# Altium PCB PCB1.PcbDoc (part 2 of 2)
Units mm, origin at the board's own origin, x right, y up, seen from the top; angles counter-clockwise.
Board outline 25 x 30 mm, 2 copper layers (Top Layer, Bottom Layer); 264 components, 8 nets, 720 pads, 0 vias.
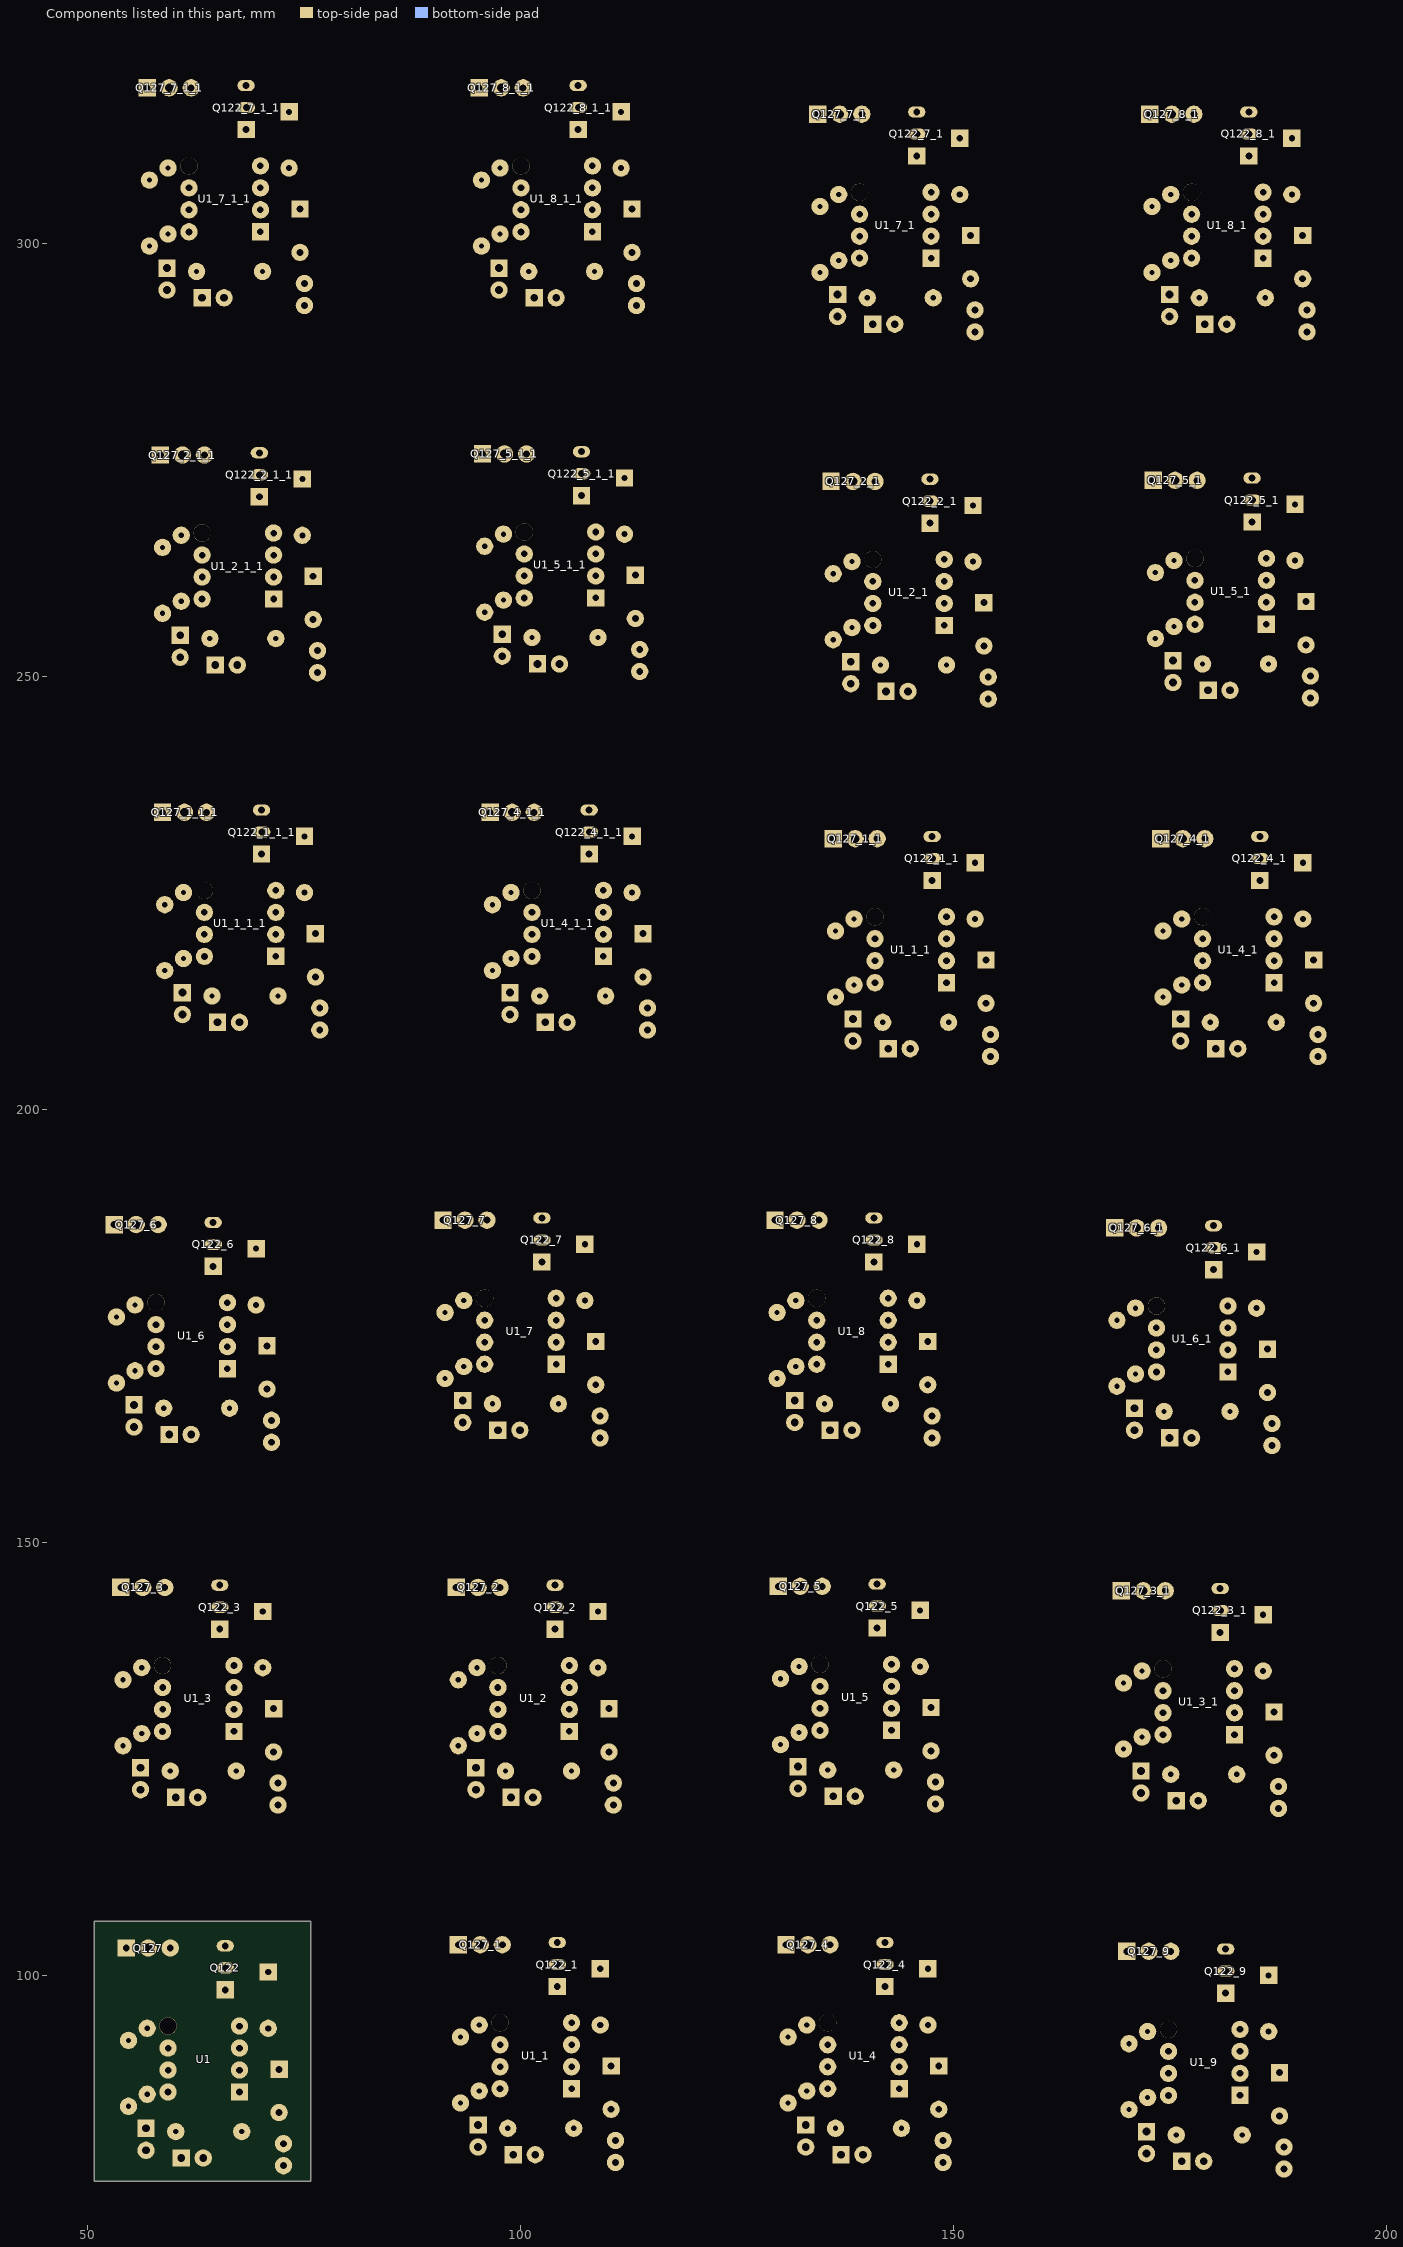
[diagram p2: the components of this part, seen from the top]

## Nets (pads, with @x,y where several pads share a name; then routed paths per layer and width w, separated by ;. In a path a pad name is that pad's centre, name@x,y a point inside that pad or via, vN(x,y) a via of type N, cw(c..) or ccw(c..) an arc to the next point about the centre after c; other vN are vias at no path point) (continued)
copper on no net: | length 4518.3
  Bottom Layer w0.5: 62.103,185.674 65.659,185.674 ; 62.865,143.764 66.421,143.764 ; 65.913,316.992 69.469,316.992 ; 67.437,274.574 70.993,274.574 ; 67.691,233.299 71.247,233.299 ; 100.076,186.182 103.632,186.182 ; 101.6,143.764 105.156,143.764 ; 101.854,102.489 105.41,102.489 ; 104.267,316.992 107.823,316.992 ; 104.648,274.701 108.204,274.701 ; 105.537,233.299 109.093,233.299 ; 138.43,186.182 141.986,186.182 ; 138.811,143.891 142.367,143.891 ; 139.7,102.489 143.256,102.489 ; 143.383,313.944 146.939,313.944 ; 144.907,271.526 148.463,271.526 ; 145.161,230.251 148.717,230.251 ; 177.673,185.293 181.229,185.293 ; 178.435,143.383 181.991,143.383 ; 179.07,101.727 182.626,101.727 ; 181.737,313.944 185.293,313.944 ; 182.118,271.653 185.674,271.653 ; 183.007,230.251 186.563,230.251
  Bottom Layer w0.7: 57.023,188.468 69.977,188.468 ; 57.785,146.558 70.739,146.558 ; 60.833,319.786 73.787,319.786 ; 62.357,277.368 75.311,277.368 ; 62.611,236.093 75.565,236.093 ; 94.996,188.976 107.95,188.976 ; 96.52,146.558 109.474,146.558 ; 96.774,105.283 109.728,105.283 ; 99.187,319.786 112.141,319.786 ; 99.568,277.495 112.522,277.495 ; 100.457,236.093 113.411,236.093 ; 133.35,188.976 146.304,188.976 ; 133.731,146.685 146.685,146.685 ; 134.62,105.283 147.574,105.283 ; 138.303,316.738 151.257,316.738 ; 139.827,274.32 152.781,274.32 ; 140.081,233.045 153.035,233.045 ; 172.593,188.087 185.547,188.087 ; 173.355,146.177 186.309,146.177 ; 173.99,104.521 186.944,104.521 ; 176.657,316.738 189.611,316.738 ; 177.038,274.447 189.992,274.447 ; 177.927,233.045 190.881,233.045
  Bottom Layer w0.8: 53.086,186.69 53.086,185.293 54.737,183.642 60.071,183.642 62.103,185.674 ; 53.34,176.022 56.769,172.593 ; 53.848,144.78 53.848,143.383 55.499,141.732 60.833,141.732 62.865,143.764 ; 54.102,134.112 57.531,130.683 ; 55.372,163.322 58.547,163.322 59.436,162.433 ; 55.499,169.799 55.499,171.704 56.388,172.593 56.769,172.593 ; 55.499,177.419 55.499,176.276 56.642,175.133 57.912,175.133 61.976,175.133 64.008,173.101 65.659,173.101 66.167,172.593 70.652,172.593 ; 55.626,186.69 55.626,187.071 57.023,188.468 ; 56.134,121.412 59.309,121.412 60.198,120.523 ; 56.261,127.889 56.261,129.794 57.15,130.683 57.531,130.683 ; 56.261,135.509 56.261,134.366 57.404,133.223 58.674,133.223 62.738,133.223 64.77,131.191 66.421,131.191 66.929,130.683 71.414,130.683 ; 56.388,144.78 56.388,145.161 57.785,146.558 ; 56.896,318.008 56.896,316.611 58.547,314.96 63.881,314.96 65.913,316.992 ; 57.15,307.34 60.579,303.911 ; 57.912,170.053 57.912,168.275 57.404,167.767 55.118,167.767 54.483,167.132 54.102,167.132 ; 57.912,172.593 56.769,172.593 ; 58.166,186.69 58.42,186.944 64.516,186.944 66.452,186.944 69.483,183.913 ; 58.42,275.59 58.42,274.193 60.071,272.542 65.405,272.542 67.437,274.574 ; 58.674,128.143 58.674,126.365 58.166,125.857 55.88,125.857 55.245,125.222 54.864,125.222 ; 58.674,130.683 57.531,130.683 ; 58.674,234.315 58.674,232.918 60.325,231.267 65.659,231.267 67.691,233.299 ; 58.674,264.922 62.103,261.493 ; 58.801,165.481 58.42,165.862 55.372,165.862 54.102,167.132 ; 58.928,144.78 59.182,145.034 65.278,145.034 67.214,145.034 70.245,142.003 ; 58.928,223.647 62.357,220.218 ; 59.182,294.64 62.357,294.64 63.246,293.751 ; 59.309,301.117 59.309,303.022 60.198,303.911 60.579,303.911 ; 59.309,308.737 59.309,307.594 60.452,306.451 61.722,306.451 65.786,306.451 67.818,304.419 69.469,304.419 69.977,303.911 74.462,303.911 ; 59.436,318.008 59.436,318.389 60.833,319.786 ; 59.563,123.571 59.182,123.952 56.134,123.952 54.864,125.222 ; 60.706,252.222 63.881,252.222 64.77,251.333 ; 60.833,258.699 60.833,260.604 61.722,261.493 62.103,261.493 ; 60.833,266.319 60.833,265.176 61.976,264.033 63.246,264.033 67.31,264.033 69.342,262.001 70.993,262.001 71.501,261.493 75.986,261.493 ; 60.96,210.947 64.135,210.947 65.024,210.058 ; 60.96,275.59 60.96,275.971 62.357,277.368 ; 61.087,217.424 61.087,219.329 61.976,220.218 62.357,220.218 ; 61.087,225.044 61.087,223.901 62.23,222.758 63.5,222.758 67.564,222.758 69.596,220.726 71.247,220.726 71.755,220.218 76.24,220.218 ; 61.214,181.737 61.214,179.832 61.722,179.832 63.881,177.673 66.167,177.673 ; 61.214,234.315 61.214,234.696 62.611,236.093 ; 61.722,301.371 61.722,299.593 61.214,299.085 58.928,299.085 58.293,298.45 57.912,298.45 ; 61.722,303.911 60.579,303.911 ; 61.976,139.827 61.976,137.922 62.484,137.922 64.643,135.763 66.929,135.763 ; 61.976,162.433 61.976,165.862 66.167,170.053 68.366,170.053 ; 61.976,318.008 62.23,318.262 68.326,318.262 70.262,318.262 73.293,315.231 ; 62.611,296.799 62.23,297.18 59.182,297.18 57.912,298.45 ; 62.738,120.523 62.738,123.952 66.929,128.143 69.128,128.143 ; 63.246,258.953 63.246,257.175 62.738,256.667 60.452,256.667 59.817,256.032 59.436,256.032 ; 63.246,261.493 62.103,261.493 ; 63.5,217.678 63.5,215.9 62.992,215.392 60.706,215.392 60.071,214.757 59.69,214.757 ; 63.5,220.218 62.357,220.218 ; 63.5,275.59 63.754,275.844 69.85,275.844 71.786,275.844 74.817,272.813 ; 63.754,234.315 64.008,234.569 70.104,234.569 72.04,234.569 75.071,231.538 ; 64.135,254.381 63.754,254.762 60.706,254.762 59.436,256.032 ; 64.389,213.106 64.008,213.487 60.96,213.487 59.69,214.757 ; 64.516,181.864 67.691,181.864 ; 64.539,184.404 63.373,184.404 60.175,181.206 53.952,181.206 51.054,178.308 51.054,170.688 53.34,168.402 54.102,167.64 54.102,167.132 ; 65.024,313.055 65.024,311.15 65.532,311.15 67.691,308.991 69.977,308.991 ; 65.278,139.954 68.453,139.954 ; 65.301,142.494 64.135,142.494 60.937,139.296 54.714,139.296 51.816,136.398 51.816,128.778 54.102,126.492 54.864,125.73 54.864,125.222 ; 65.659,185.674 67.691,183.642 67.691,181.864 ; 65.786,293.751 65.786,297.18 69.977,301.371 72.176,301.371 ; 66.167,175.133 67.818,176.784 67.818,177.673 67.691,177.8 67.691,181.864 ; 66.421,143.764 68.453,141.732 68.453,139.954 ; 66.421,165.481 66.421,162.56 67.437,161.544 71.247,161.544 ; 66.548,270.637 66.548,268.732 67.056,268.732 69.215,266.573 71.501,266.573 ; 66.802,229.362 66.802,227.457 67.31,227.457 69.469,225.298 71.755,225.298 ; 66.929,133.223 68.58,134.874 68.58,135.763 68.453,135.89 68.453,139.954 ; 67.183,123.571 67.183,120.65 68.199,119.634 72.009,119.634 ; 67.31,251.333 67.31,254.762 71.501,258.953 73.7,258.953 ; 67.564,210.058 67.564,213.487 71.755,217.678 73.954,217.678 ; 68.326,313.182 71.501,313.182 ; 68.349,315.722 67.183,315.722 63.985,312.524 57.762,312.524 54.864,309.626 54.864,302.006 57.15,299.72 57.912,298.958 57.912,298.45 ; 69.469,316.992 71.501,314.96 71.501,313.182 ; 69.483,177.413 70.872,177.413 71.501,176.784 ; 69.85,270.764 73.025,270.764 ; 69.873,273.304 68.707,273.304 65.509,270.106 59.286,270.106 56.388,267.208 56.388,259.588 58.674,257.302 59.436,256.54 59.436,256.032 ; 69.977,188.468 71.501,186.944 71.501,176.784 ; 69.977,306.451 71.628,308.102 71.628,308.991 71.501,309.118 71.501,313.182 ; 70.104,229.489 73.279,229.489 ; 70.127,232.029 68.961,232.029 65.763,228.831 59.54,228.831 56.642,225.933 56.642,218.313 58.928,216.027 59.69,215.265 59.69,214.757 ; 70.231,296.799 70.231,293.878 71.247,292.862 75.057,292.862 ; 70.245,135.503 71.634,135.503 72.263,134.874 ; 70.739,146.558 72.263,145.034 72.263,134.874 ; 70.739,167.68 68.366,170.053 ; 70.993,274.574 73.025,272.542 73.025,270.764 ; 71.247,164.084 70.612,164.719 70.612,165.354 ; 71.247,233.299 73.279,231.267 73.279,229.489 ; 71.501,125.77 69.128,128.143 ; 71.501,264.033 73.152,265.684 73.152,266.573 73.025,266.7 73.025,270.764 ; 71.755,222.758 73.406,224.409 73.406,225.298 73.279,225.425 73.279,229.489 ; 71.755,254.381 71.755,251.46 72.771,250.444 76.581,250.444 ; 72.009,122.174 71.374,122.809 71.374,123.444 ; 72.009,213.106 72.009,210.185 73.025,209.169 76.835,209.169 ; 73.293,308.731 74.682,308.731 75.311,308.102 ; 73.787,319.786 75.311,318.262 75.311,308.102 ; 74.549,298.998 72.176,301.371 ; 74.817,266.313 76.206,266.313 76.835,265.684 ; 75.057,295.402 74.422,296.037 74.422,296.672 ; 75.071,225.038 76.46,225.038 77.089,224.409 ; 75.311,277.368 76.835,275.844 76.835,265.684 ; 75.565,236.093 77.089,234.569 77.089,224.409 ; 76.073,256.58 73.7,258.953 ; 76.327,215.305 73.954,217.678 ; 76.581,252.984 75.946,253.619 75.946,254.254 ; 76.835,211.709 76.2,212.344 76.2,212.979 ; 91.059,187.198 91.059,185.801 92.71,184.15 98.044,184.15 100.076,186.182 ; 91.313,176.53 94.742,173.101 ; 92.583,144.78 92.583,143.383 94.234,141.732 99.568,141.732 101.6,143.764 ; 92.837,134.112 96.266,130.683 ; 93.091,92.837 96.52,89.408 ; 93.345,163.83 96.52,163.83 97.409,162.941 ; 93.472,170.307 93.472,172.212 94.361,173.101 94.742,173.101 ; 93.472,177.927 93.472,176.784 94.615,175.641 95.885,175.641 99.949,175.641 101.981,173.609 103.632,173.609 104.14,173.101 108.625,173.101 ; 93.599,187.198 93.599,187.579 94.996,188.976 ; 94.869,121.412 98.044,121.412 98.933,120.523 ; 94.996,127.889 94.996,129.794 95.885,130.683 96.266,130.683 ; 94.996,135.509 94.996,134.366 96.139,133.223 97.409,133.223 101.473,133.223 103.505,131.191 105.156,131.191 105.664,130.683 110.149,130.683 ; 95.123,80.137 98.298,80.137 99.187,79.248 ; 95.123,144.78 95.123,145.161 96.52,146.558 ; 95.25,86.614 95.25,88.519 96.139,89.408 96.52,89.408 ; 95.25,94.234 95.25,93.091 96.393,91.948 97.663,91.948 101.727,91.948 103.759,89.916 105.41,89.916 105.918,89.408 110.403,89.408 ; 95.25,318.008 95.25,316.611 96.901,314.96 102.235,314.96 104.267,316.992 ; 95.377,103.505 95.377,103.886 96.774,105.283 ; 95.504,307.34 98.933,303.911 ; 95.631,275.717 95.631,274.32 97.282,272.669 102.616,272.669 104.648,274.701 ; 95.885,170.561 95.885,168.783 95.377,168.275 93.091,168.275 92.456,167.64 92.075,167.64 ; 95.885,173.101 94.742,173.101 ; 95.885,265.049 99.314,261.62 ; 96.139,187.198 96.393,187.452 102.489,187.452 104.425,187.452 107.456,184.421 ; 96.52,234.315 96.52,232.918 98.171,231.267 103.505,231.267 105.537,233.299 ; 96.774,165.989 96.393,166.37 93.345,166.37 92.075,167.64 ; 96.774,223.647 100.203,220.218 ; 97.409,128.143 97.409,126.365 96.901,125.857 94.615,125.857 93.98,125.222 93.599,125.222 ; 97.409,130.683 96.266,130.683 ; 97.536,294.64 100.711,294.64 101.6,293.751 ; 97.663,86.868 97.663,85.09 97.155,84.582 94.869,84.582 94.234,83.947 93.853,83.947 ; 97.663,89.408 96.52,89.408 ; 97.663,144.78 97.917,145.034 104.013,145.034 105.949,145.034 108.98,142.003 ; 97.663,301.117 97.663,303.022 98.552,303.911 98.933,303.911 ; 97.663,308.737 97.663,307.594 98.806,306.451 100.076,306.451 104.14,306.451 106.172,304.419 107.823,304.419 108.331,303.911 112.816,303.911 ; 97.79,318.008 97.79,318.389 99.187,319.786 ; 97.917,103.505 98.171,103.759 104.267,103.759 106.203,103.759 109.234,100.728 ; 97.917,252.349 101.092,252.349 101.981,251.46 ; 98.044,258.826 98.044,260.731 98.933,261.62 99.314,261.62 ; 98.044,266.446 98.044,265.303 99.187,264.16 100.457,264.16 104.521,264.16 106.553,262.128 108.204,262.128 108.712,261.62 113.197,261.62 ; 98.171,275.717 98.171,276.098 99.568,277.495 ; 98.298,123.571 97.917,123.952 94.869,123.952 93.599,125.222 ; 98.552,82.296 98.171,82.677 95.123,82.677 93.853,83.947 ; 98.806,210.947 101.981,210.947 102.87,210.058 ; 98.933,217.424 98.933,219.329 99.822,220.218 100.203,220.218 ; 98.933,225.044 98.933,223.901 100.076,222.758 101.346,222.758 105.41,222.758 107.442,220.726 109.093,220.726 109.601,220.218 114.086,220.218 ; 99.06,234.315 99.06,234.696 100.457,236.093 ; 99.187,182.245 99.187,180.34 99.695,180.34 101.854,178.181 104.14,178.181 ; 99.949,162.941 99.949,166.37 104.14,170.561 106.339,170.561 ; 100.076,301.371 100.076,299.593 99.568,299.085 97.282,299.085 96.647,298.45 96.266,298.45 ; 100.076,303.911 98.933,303.911 ; 100.33,318.008 100.584,318.262 106.68,318.262 108.616,318.262 111.647,315.231 ; 100.457,259.08 100.457,257.302 99.949,256.794 97.663,256.794 97.028,256.159 96.647,256.159 ; 100.457,261.62 99.314,261.62 ; 100.711,139.827 100.711,137.922 101.219,137.922 103.378,135.763 105.664,135.763 ; 100.711,275.717 100.965,275.971 107.061,275.971 108.997,275.971 112.028,272.94 ; 100.965,98.552 100.965,96.647 101.473,96.647 103.632,94.488 105.918,94.488 ; 100.965,296.799 100.584,297.18 97.536,297.18 96.266,298.45 ; 101.346,217.678 101.346,215.9 100.838,215.392 98.552,215.392 97.917,214.757 97.536,214.757 ; 101.346,220.218 100.203,220.218 ; 101.346,254.508 100.965,254.889 97.917,254.889 96.647,256.159 ; 101.473,120.523 101.473,123.952 105.664,128.143 107.863,128.143 ; 101.6,234.315 101.854,234.569 107.95,234.569 109.886,234.569 112.917,231.538 ; 101.727,79.248 101.727,82.677 105.918,86.868 108.117,86.868 ; 101.854,102.489 99.822,100.457 94.488,100.457 92.837,102.108 ; 102.235,213.106 101.854,213.487 98.806,213.487 97.536,214.757 ; 102.489,182.372 105.664,182.372 ; 102.512,184.912 101.346,184.912 98.148,181.714 91.925,181.714 89.027,178.816 89.027,171.196 91.313,168.91 92.075,168.148 92.075,167.64 ; 103.378,313.055 103.378,311.15 103.886,311.15 106.045,308.991 108.331,308.991 ; 103.632,186.182 105.664,184.15 105.664,182.372 ; 103.759,270.764 103.759,268.859 104.267,268.859 106.426,266.7 108.712,266.7 ; 104.013,139.954 107.188,139.954 ; 104.036,142.494 102.87,142.494 99.672,139.296 93.449,139.296 90.551,136.398 90.551,128.778 92.837,126.492 93.599,125.73 93.599,125.222 ; 104.14,175.641 105.791,177.292 105.791,178.181 105.664,178.308 105.664,182.372 ; 104.14,293.751 104.14,297.18 108.331,301.371 110.53,301.371 ; 104.267,98.679 107.442,98.679 ; 104.29,101.219 103.124,101.219 99.926,98.021 93.703,98.021 90.805,95.123 90.805,87.503 93.091,85.217 93.853,84.455 93.853,83.947 ; 104.394,165.989 104.394,163.068 105.41,162.052 109.22,162.052 ; 104.521,251.46 104.521,254.889 108.712,259.08 110.911,259.08 ; 104.648,229.362 104.648,227.457 105.156,227.457 107.315,225.298 109.601,225.298 ; 105.156,143.764 107.188,141.732 107.188,139.954 ; 105.41,102.489 107.442,100.457 107.442,98.679 ; 105.41,210.058 105.41,213.487 109.601,217.678 111.8,217.678 ; 105.664,133.223 107.315,134.874 107.315,135.763 107.188,135.89 107.188,139.954 ; 105.918,91.948 107.569,93.599 107.569,94.488 107.442,94.615 107.442,98.679 ; 105.918,123.571 105.918,120.65 106.934,119.634 110.744,119.634 ; 106.172,82.296 106.172,79.375 107.188,78.359 110.998,78.359 ; 106.68,313.182 109.855,313.182 ; 106.703,315.722 105.537,315.722 102.339,312.524 96.116,312.524 93.218,309.626 93.218,302.006 95.504,299.72 96.266,298.958 96.266,298.45 ; 107.061,270.891 110.236,270.891 ; 107.084,273.431 105.918,273.431 102.72,270.233 96.497,270.233 93.599,267.335 93.599,259.715 95.885,257.429 96.647,256.667 96.647,256.159 ; 107.456,177.921 108.845,177.921 109.474,177.292 ; 107.823,316.992 109.855,314.96 109.855,313.182 ; 107.95,188.976 109.474,187.452 109.474,177.292 ; 107.95,229.489 111.125,229.489 ; 107.973,232.029 106.807,232.029 103.609,228.831 97.386,228.831 94.488,225.933 94.488,218.313 96.774,216.027 97.536,215.265 97.536,214.757 ; 108.204,274.701 110.236,272.669 110.236,270.891 ; 108.331,306.451 109.982,308.102 109.982,308.991 109.855,309.118 109.855,313.182 ; 108.585,296.799 108.585,293.878 109.601,292.862 113.411,292.862 ; 108.712,168.188 106.339,170.561 ; 108.712,264.16 110.363,265.811 110.363,266.7 110.236,266.827 110.236,270.891 ; 108.966,254.508 108.966,251.587 109.982,250.571 113.792,250.571 ; 108.98,135.503 110.369,135.503 110.998,134.874 ; 109.093,233.299 111.125,231.267 111.125,229.489 ; 109.22,164.592 108.585,165.227 108.585,165.862 ; 109.234,94.228 110.623,94.228 111.252,93.599 ; 109.474,146.558 110.998,145.034 110.998,134.874 ; 109.601,222.758 111.252,224.409 111.252,225.298 111.125,225.425 111.125,229.489 ; 109.728,105.283 111.252,103.759 111.252,93.599 ; 109.855,213.106 109.855,210.185 110.871,209.169 114.681,209.169 ; 110.236,125.77 107.863,128.143 ; 110.49,84.495 108.117,86.868 ; 110.744,122.174 110.109,122.809 110.109,123.444 ; 110.998,80.899 110.363,81.534 110.363,82.169 ; 111.647,308.731 113.036,308.731 113.665,308.102 ; 112.028,266.44 113.417,266.44 114.046,265.811 ; 112.141,319.786 113.665,318.262 113.665,308.102 ; 112.522,277.495 114.046,275.971 114.046,265.811 ; 112.903,298.998 110.53,301.371 ; 112.917,225.038 114.306,225.038 114.935,224.409 ; 113.284,256.707 110.911,259.08 ; 113.411,236.093 114.935,234.569 114.935,224.409 ; 113.411,295.402 112.776,296.037 112.776,296.672 ; 113.792,253.111 113.157,253.746 113.157,254.381 ; 114.173,215.305 111.8,217.678 ; 114.681,211.709 114.046,212.344 114.046,212.979 ; 129.413,187.198 129.413,185.801 131.064,184.15 136.398,184.15 138.43,186.182 ; 129.667,176.53 133.096,173.101 ; 129.794,144.907 129.794,143.51 131.445,141.859 136.779,141.859 138.811,143.891 ; 130.048,134.239 133.477,130.81 ; 130.683,103.505 130.683,102.108 132.334,100.457 137.668,100.457 139.7,102.489 ; 130.937,92.837 134.366,89.408 ; 131.699,163.83 134.874,163.83 135.763,162.941 ; 131.826,170.307 131.826,172.212 132.715,173.101 133.096,173.101 ; 131.826,177.927 131.826,176.784 132.969,175.641 134.239,175.641 138.303,175.641 140.335,173.609 141.986,173.609 142.494,173.101 146.979,173.101 ; 131.953,187.198 131.953,187.579 133.35,188.976 ; 132.08,121.539 135.255,121.539 136.144,120.65 ; 132.207,128.016 132.207,129.921 133.096,130.81 133.477,130.81 ; 132.207,135.636 132.207,134.493 133.35,133.35 134.62,133.35 138.684,133.35 140.716,131.318 142.367,131.318 142.875,130.81 147.36,130.81 ; 132.334,144.907 132.334,145.288 133.731,146.685 ; 132.969,80.137 136.144,80.137 137.033,79.248 ; 133.096,86.614 133.096,88.519 133.985,89.408 134.366,89.408 ; 133.096,94.234 133.096,93.091 134.239,91.948 135.509,91.948 139.573,91.948 141.605,89.916 143.256,89.916 143.764,89.408 148.249,89.408 ; 133.223,103.505 133.223,103.886 134.62,105.283 ; 134.239,170.561 134.239,168.783 133.731,168.275 131.445,168.275 130.81,167.64 130.429,167.64 ; 134.239,173.101 133.096,173.101 ; 134.366,314.96 134.366,313.563 136.017,311.912 141.351,311.912 143.383,313.944 ; 134.493,187.198 134.747,187.452 140.843,187.452 142.779,187.452 145.81,184.421 ; 134.62,128.27 134.62,126.492 134.112,125.984 131.826,125.984 131.191,125.349 130.81,125.349 ; 134.62,130.81 133.477,130.81 ; 134.62,304.292 138.049,300.863 ; 134.874,144.907 135.128,145.161 141.224,145.161 143.16,145.161 146.191,142.13 ; 135.128,165.989 134.747,166.37 131.699,166.37 130.429,167.64 ; 135.509,86.868 135.509,85.09 135.001,84.582 132.715,84.582 132.08,83.947 131.699,83.947 ; 135.509,89.408 134.366,89.408 ; 135.509,123.698 135.128,124.079 132.08,124.079 130.81,125.349 ; 135.763,103.505 136.017,103.759 142.113,103.759 144.049,103.759 147.08,100.728 ; 135.89,272.542 135.89,271.145 137.541,269.494 142.875,269.494 144.907,271.526 ; 136.144,231.267 136.144,229.87 137.795,228.219 143.129,228.219 145.161,230.251 ; 136.144,261.874 139.573,258.445 ; 136.398,82.296 136.017,82.677 132.969,82.677 131.699,83.947 ; 136.398,220.599 139.827,217.17 ; 136.652,291.592 139.827,291.592 140.716,290.703 ; 136.779,298.069 136.779,299.974 137.668,300.863 138.049,300.863 ; 136.779,305.689 136.779,304.546 137.922,303.403 139.192,303.403 143.256,303.403 145.288,301.371 146.939,301.371 147.447,300.863 151.932,300.863 ; 136.906,314.96 136.906,315.341 138.303,316.738 ; 137.541,182.245 137.541,180.34 138.049,180.34 140.208,178.181 142.494,178.181 ; 137.922,139.954 137.922,138.049 138.43,138.049 140.589,135.89 142.875,135.89 ; 138.176,249.174 141.351,249.174 142.24,248.285 ; 138.303,162.941 138.303,166.37 142.494,170.561 144.693,170.561 ; 138.303,255.651 138.303,257.556 139.192,258.445 139.573,258.445 ; 138.303,263.271 138.303,262.128 139.446,260.985 140.716,260.985 144.78,260.985 146.812,258.953 148.463,258.953 148.971,258.445 153.456,258.445 ; 138.43,207.899 141.605,207.899 142.494,207.01 ; 138.43,272.542 138.43,272.923 139.827,274.32 ; 138.557,214.376 138.557,216.281 139.446,217.17 139.827,217.17 ; 138.557,221.996 138.557,220.853 139.7,219.71 140.97,219.71 145.034,219.71 147.066,217.678 148.717,217.678 149.225,217.17 153.71,217.17 ; 138.684,120.65 138.684,124.079 142.875,128.27 145.074,128.27 ; 138.684,231.267 138.684,231.648 140.081,233.045 ; 138.811,98.552 138.811,96.647 139.319,96.647 141.478,94.488 143.764,94.488 ; 139.192,298.323 139.192,296.545 138.684,296.037 136.398,296.037 135.763,295.402 135.382,295.402 ; 139.192,300.863 138.049,300.863 ; 139.446,314.96 139.7,315.214 145.796,315.214 147.732,315.214 150.763,312.183 ; 139.573,79.248 139.573,82.677 143.764,86.868 145.963,86.868 ; 140.081,293.751 139.7,294.132 136.652,294.132 135.382,295.402 ; 140.716,255.905 140.716,254.127 140.208,253.619 137.922,253.619 137.287,252.984 136.906,252.984 ; 140.716,258.445 139.573,258.445 ; 140.843,182.372 144.018,182.372 ; 140.866,184.912 139.7,184.912 136.502,181.714 130.279,181.714 127.381,178.816 127.381,171.196 129.667,168.91 130.429,168.148 130.429,167.64 ; 140.97,214.63 140.97,212.852 140.462,212.344 138.176,212.344 137.541,211.709 137.16,211.709 ; 140.97,217.17 139.827,217.17 ; 140.97,272.542 141.224,272.796 147.32,272.796 149.256,272.796 152.287,269.765 ; 141.224,140.081 144.399,140.081 ; 141.224,231.267 141.478,231.521 147.574,231.521 149.51,231.521 152.541,228.49 ; 141.247,142.621 140.081,142.621 136.883,139.423 130.66,139.423 127.762,136.525 127.762,128.905 130.048,126.619 130.81,125.857 130.81,125.349 ; 141.605,251.333 141.224,251.714 138.176,251.714 136.906,252.984 ; 141.859,210.058 141.478,210.439 138.43,210.439 137.16,211.709 ; 141.986,186.182 144.018,184.15 144.018,182.372 ; 142.113,98.679 145.288,98.679 ; 142.136,101.219 140.97,101.219 137.772,98.021 131.549,98.021 128.651,95.123 128.651,87.503 130.937,85.217 131.699,84.455 131.699,83.947 ; 142.367,143.891 144.399,141.859 144.399,140.081 ; 142.494,175.641 144.145,177.292 144.145,178.181 144.018,178.308 144.018,182.372 ; 142.494,310.007 142.494,308.102 143.002,308.102 145.161,305.943 147.447,305.943 ; 142.748,165.989 142.748,163.068 143.764,162.052 147.574,162.052 ; 142.875,133.35 144.526,135.001 144.526,135.89 144.399,136.017 144.399,140.081 ; 143.129,123.698 143.129,120.777 144.145,119.761 147.955,119.761 ; 143.256,102.489 145.288,100.457 145.288,98.679 ; 143.256,290.703 143.256,294.132 147.447,298.323 149.646,298.323 ; 143.764,91.948 145.415,93.599 145.415,94.488 145.288,94.615 145.288,98.679 ; 144.018,82.296 144.018,79.375 145.034,78.359 148.844,78.359 ; 144.018,267.589 144.018,265.684 144.526,265.684 146.685,263.525 148.971,263.525 ; 144.272,226.314 144.272,224.409 144.78,224.409 146.939,222.25 149.225,222.25 ; 144.78,248.285 144.78,251.714 148.971,255.905 151.17,255.905 ; 145.034,207.01 145.034,210.439 149.225,214.63 151.424,214.63 ; 145.796,310.134 148.971,310.134 ; 145.81,177.921 147.199,177.921 147.828,177.292 ; 145.819,312.674 144.653,312.674 141.455,309.476 135.232,309.476 132.334,306.578 132.334,298.958 134.62,296.672 135.382,295.91 135.382,295.402 ; 146.191,135.63 147.58,135.63 148.209,135.001 ; 146.304,188.976 147.828,187.452 147.828,177.292 ; 146.685,146.685 148.209,145.161 148.209,135.001 ; 146.939,313.944 148.971,311.912 148.971,310.134 ; 147.066,168.188 144.693,170.561 ; 147.08,94.228 148.469,94.228 149.098,93.599 ; 147.32,267.716 150.495,267.716 ; 147.343,270.256 146.177,270.256 142.979,267.058 136.756,267.058 133.858,264.16 133.858,256.54 136.144,254.254 136.906,253.492 136.906,252.984 ; 147.447,125.897 145.074,128.27 ; 147.447,303.403 149.098,305.054 149.098,305.943 148.971,306.07 148.971,310.134 ; 147.574,105.283 149.098,103.759 149.098,93.599 ; 147.574,164.592 146.939,165.227 146.939,165.862 ; 147.574,226.441 150.749,226.441 ; 147.597,228.981 146.431,228.981 143.233,225.783 137.01,225.783 134.112,222.885 134.112,215.265 136.398,212.979 137.16,212.217 137.16,211.709 ; 147.701,293.751 147.701,290.83 148.717,289.814 152.527,289.814 ; 147.955,122.301 147.32,122.936 147.32,123.571 ; 148.336,84.495 145.963,86.868 ; 148.463,271.526 150.495,269.494 150.495,267.716 ; 148.717,230.251 150.749,228.219 150.749,226.441 ; 148.844,80.899 148.209,81.534 148.209,82.169 ; 148.971,260.985 150.622,262.636 150.622,263.525 150.495,263.652 150.495,267.716 ; 149.225,219.71 150.876,221.361 150.876,222.25 150.749,222.377 150.749,226.441 ; 149.225,251.333 149.225,248.412 150.241,247.396 154.051,247.396 ; 149.479,210.058 149.479,207.137 150.495,206.121 154.305,206.121 ; 150.763,305.683 152.152,305.683 152.781,305.054 ; 151.257,316.738 152.781,315.214 152.781,305.054 ; 152.019,295.95 149.646,298.323 ; 152.287,263.265 153.676,263.265 154.305,262.636 ; 152.527,292.354 151.892,292.989 151.892,293.624 ; 152.541,221.99 153.93,221.99 154.559,221.361 ; 152.781,274.32 154.305,272.796 154.305,262.636 ; 153.035,233.045 154.559,231.521 154.559,221.361 ; 153.543,253.532 151.17,255.905 ; 153.797,212.257 151.424,214.63 ; 154.051,249.936 153.416,250.571 153.416,251.206 ; 154.305,208.661 153.67,209.296 153.67,209.931 ; 168.656,186.309 168.656,184.912 170.307,183.261 175.641,183.261 177.673,185.293 ; 168.91,175.641 172.339,172.212 ; 169.418,144.399 169.418,143.002 171.069,141.351 176.403,141.351 178.435,143.383 ; 169.672,133.731 173.101,130.302 ; 170.053,102.743 170.053,101.346 171.704,99.695 177.038,99.695 179.07,101.727 ; 170.307,92.075 173.736,88.646 ; 170.942,162.941 174.117,162.941 175.006,162.052 ; 171.069,169.418 171.069,171.323 171.958,172.212 172.339,172.212 ; 171.069,177.038 171.069,175.895 172.212,174.752 173.482,174.752 177.546,174.752 179.578,172.72 181.229,172.72 181.737,172.212 186.222,172.212 ; 171.196,186.309 171.196,186.69 172.593,188.087 ; 171.704,121.031 174.879,121.031 175.768,120.142 ; 171.831,127.508 171.831,129.413 172.72,130.302 173.101,130.302 ; 171.831,135.128 171.831,133.985 172.974,132.842 174.244,132.842 178.308,132.842 180.34,130.81 181.991,130.81 182.499,130.302 186.984,130.302 ; 171.958,144.399 171.958,144.78 173.355,146.177 ; 172.339,79.375 175.514,79.375 176.403,78.486 ; 172.466,85.852 172.466,87.757 173.355,88.646 173.736,88.646 ; 172.466,93.472 172.466,92.329 173.609,91.186 174.879,91.186 178.943,91.186 180.975,89.154 182.626,89.154 183.134,88.646 187.619,88.646 ; 172.593,102.743 172.593,103.124 173.99,104.521 ; 172.72,314.96 172.72,313.563 174.371,311.912 179.705,311.912 181.737,313.944 ; 172.974,304.292 176.403,300.863 ; 173.101,272.669 173.101,271.272 174.752,269.621 180.086,269.621 182.118,271.653 ; 173.355,262.001 176.784,258.572 ; 173.482,169.672 173.482,167.894 172.974,167.386 170.688,167.386 170.053,166.751 169.672,166.751 ; 173.482,172.212 172.339,172.212 ; 173.736,186.309 173.99,186.563 180.086,186.563 182.022,186.563 185.053,183.532 ; 173.99,231.267 173.99,229.87 175.641,228.219 180.975,228.219 183.007,230.251 ; 174.244,127.762 174.244,125.984 173.736,125.476 171.45,125.476 170.815,124.841 170.434,124.841 ; 174.244,130.302 173.101,130.302 ; 174.244,220.599 177.673,217.17 ; 174.371,165.1 173.99,165.481 170.942,165.481 169.672,166.751 ; 174.498,144.399 174.752,144.653 180.848,144.653 182.784,144.653 185.815,141.622 ; 174.879,86.106 174.879,84.328 174.371,83.82 172.085,83.82 171.45,83.185 171.069,83.185 ; 174.879,88.646 173.736,88.646 ; 175.006,291.592 178.181,291.592 179.07,290.703 ; 175.133,102.743 175.387,102.997 181.483,102.997 183.419,102.997 186.45,99.966 ; 175.133,123.19 174.752,123.571 171.704,123.571 170.434,124.841 ; 175.133,298.069 175.133,299.974 176.022,300.863 176.403,300.863 ; 175.133,305.689 175.133,304.546 176.276,303.403 177.546,303.403 181.61,303.403 183.642,301.371 185.293,301.371 185.801,300.863 190.286,300.863 ; 175.26,314.96 175.26,315.341 176.657,316.738 ; 175.387,249.301 178.562,249.301 179.451,248.412 ; 175.514,255.778 175.514,257.683 176.403,258.572 176.784,258.572 ; 175.514,263.398 175.514,262.255 176.657,261.112 177.927,261.112 181.991,261.112 184.023,259.08 185.674,259.08 186.182,258.572 190.667,258.572 ; 175.641,272.669 175.641,273.05 177.038,274.447 ; 175.768,81.534 175.387,81.915 172.339,81.915 171.069,83.185 ; 176.276,207.899 179.451,207.899 180.34,207.01 ; 176.403,214.376 176.403,216.281 177.292,217.17 177.673,217.17 ; 176.403,221.996 176.403,220.853 177.546,219.71 178.816,219.71 182.88,219.71 184.912,217.678 186.563,217.678 187.071,217.17 191.556,217.17 ; 176.53,231.267 176.53,231.648 177.927,233.045 ; 176.784,181.356 176.784,179.451 177.292,179.451 179.451,177.292 181.737,177.292 ; 177.546,139.446 177.546,137.541 178.054,137.541 180.213,135.382 182.499,135.382 ; 177.546,162.052 177.546,165.481 181.737,169.672 183.936,169.672 ; 177.546,298.323 177.546,296.545 177.038,296.037 174.752,296.037 174.117,295.402 173.736,295.402 ; 177.546,300.863 176.403,300.863 ; 177.8,314.96 178.054,315.214 184.15,315.214 186.086,315.214 189.117,312.183 ; 177.927,256.032 177.927,254.254 177.419,253.746 175.133,253.746 174.498,253.111 174.117,253.111 ; 177.927,258.572 176.784,258.572 ; 178.181,97.79 178.181,95.885 178.689,95.885 180.848,93.726 183.134,93.726 ; 178.181,272.669 178.435,272.923 184.531,272.923 186.467,272.923 189.498,269.892 ; 178.308,120.142 178.308,123.571 182.499,127.762 184.698,127.762 ; 178.435,293.751 178.054,294.132 175.006,294.132 173.736,295.402 ; 178.816,214.63 178.816,212.852 178.308,212.344 176.022,212.344 175.387,211.709 175.006,211.709 ; 178.816,217.17 177.673,217.17 ; 178.816,251.46 178.435,251.841 175.387,251.841 174.117,253.111 ; 178.943,78.486 178.943,81.915 183.134,86.106 185.333,86.106 ; 179.07,231.267 179.324,231.521 185.42,231.521 187.356,231.521 190.387,228.49 ; 179.705,210.058 179.324,210.439 176.276,210.439 175.006,211.709 ; 180.086,181.483 183.261,181.483 ; 180.109,184.023 178.943,184.023 175.745,180.825 169.522,180.825 166.624,177.927 166.624,170.307 168.91,168.021 169.672,167.259 169.672,166.751 ; 180.848,139.573 184.023,139.573 ; 180.848,310.007 180.848,308.102 181.356,308.102 183.515,305.943 185.801,305.943 ; 180.871,142.113 179.705,142.113 176.507,138.915 170.284,138.915 167.386,136.017 167.386,128.397 169.672,126.111 170.434,125.349 170.434,124.841 ; 181.229,185.293 183.261,183.261 183.261,181.483 ; 181.229,267.716 181.229,265.811 181.737,265.811 183.896,263.652 186.182,263.652 ; 181.483,97.917 184.658,97.917 ; 181.506,100.457 180.34,100.457 177.142,97.259 170.919,97.259 168.021,94.361 168.021,86.741 170.307,84.455 171.069,83.693 171.069,83.185 ; 181.61,290.703 181.61,294.132 185.801,298.323 188,298.323 ; 181.737,174.752 183.388,176.403 183.388,177.292 183.261,177.419 183.261,181.483 ; 181.991,143.383 184.023,141.351 184.023,139.573 ; 181.991,165.1 181.991,162.179 183.007,161.163 186.817,161.163 ; 181.991,248.412 181.991,251.841 186.182,256.032 188.381,256.032 ; 182.118,226.314 182.118,224.409 182.626,224.409 184.785,222.25 187.071,222.25 ; 182.499,132.842 184.15,134.493 184.15,135.382 184.023,135.509 184.023,139.573 ; 182.626,101.727 184.658,99.695 184.658,97.917 ; 182.753,123.19 182.753,120.269 183.769,119.253 187.579,119.253 ; 182.88,207.01 182.88,210.439 187.071,214.63 189.27,214.63 ; 183.134,91.186 184.785,92.837 184.785,93.726 184.658,93.853 184.658,97.917 ; 183.388,81.534 183.388,78.613 184.404,77.597 188.214,77.597 ; 184.15,310.134 187.325,310.134 ; 184.173,312.674 183.007,312.674 179.809,309.476 173.586,309.476 170.688,306.578 170.688,298.958 172.974,296.672 173.736,295.91 173.736,295.402 ; 184.531,267.843 187.706,267.843 ; 184.554,270.383 183.388,270.383 180.19,267.185 173.967,267.185 171.069,264.287 171.069,256.667 173.355,254.381 174.117,253.619 174.117,253.111 ; 185.053,177.032 186.442,177.032 187.071,176.403 ; 185.293,313.944 187.325,311.912 187.325,310.134 ; 185.42,226.441 188.595,226.441 ; 185.443,228.981 184.277,228.981 181.079,225.783 174.856,225.783 171.958,222.885 171.958,215.265 174.244,212.979 175.006,212.217 175.006,211.709 ; 185.547,188.087 187.071,186.563 187.071,176.403 ; 185.674,271.653 187.706,269.621 187.706,267.843 ; 185.801,303.403 187.452,305.054 187.452,305.943 187.325,306.07 187.325,310.134 ; 185.815,135.122 187.204,135.122 187.833,134.493 ; 186.055,293.751 186.055,290.83 187.071,289.814 190.881,289.814 ; 186.182,261.112 187.833,262.763 187.833,263.652 187.706,263.779 187.706,267.843 ; 186.309,146.177 187.833,144.653 187.833,134.493 ; 186.309,167.299 183.936,169.672 ; 186.436,251.46 186.436,248.539 187.452,247.523 191.262,247.523 ; 186.45,93.466 187.839,93.466 188.468,92.837 ; 186.563,230.251 188.595,228.219 188.595,226.441 ; 186.817,163.703 186.182,164.338 186.182,164.973 ; 186.944,104.521 188.468,102.997 188.468,92.837 ; 187.071,125.389 184.698,127.762 ; 187.071,219.71 188.722,221.361 188.722,222.25 188.595,222.377 188.595,226.441 ; 187.325,210.058 187.325,207.137 188.341,206.121 192.151,206.121 ; 187.579,121.793 186.944,122.428 186.944,123.063 ; 187.706,83.733 185.333,86.106 ; 188.214,80.137 187.579,80.772 187.579,81.407 ; 189.117,305.683 190.506,305.683 191.135,305.054 ; 189.498,263.392 190.887,263.392 191.516,262.763 ; 189.611,316.738 191.135,315.214 191.135,305.054 ; 189.992,274.447 191.516,272.923 191.516,262.763 ; 190.373,295.95 188,298.323 ; 190.387,221.99 191.776,221.99 192.405,221.361 ; 190.754,253.659 188.381,256.032 ; 190.881,233.045 192.405,231.521 192.405,221.361 ; 190.881,292.354 190.246,292.989 190.246,293.624 ; 191.262,250.063 190.627,250.698 190.627,251.333 ; 191.643,212.257 189.27,214.63 ; 192.151,208.661 191.516,209.296 191.516,209.931 ; 68.366,170.053 68.366,166.584 69.596,165.354 70.612,165.354 ; 69.128,128.143 69.128,124.674 70.358,123.444 71.374,123.444 ; 70.612,165.354 72.644,167.386 72.644,175.641 71.501,176.784 ; 71.374,123.444 73.406,125.476 73.406,133.731 72.263,134.874 ; 72.176,301.371 72.176,297.902 73.406,296.672 74.422,296.672 ; 73.7,258.953 73.7,255.484 74.93,254.254 75.946,254.254 ; 73.954,217.678 73.954,214.209 75.184,212.979 76.2,212.979 ; 74.422,296.672 76.454,298.704 76.454,306.959 75.311,308.102 ; 75.946,254.254 77.978,256.286 77.978,264.541 76.835,265.684 ; 76.2,212.979 78.232,215.011 78.232,223.266 77.089,224.409 ; 92.837,102.108 92.837,103.505 92.837,102.108 ; 106.339,170.561 106.339,167.092 107.569,165.862 108.585,165.862 ; 107.863,128.143 107.863,124.674 109.093,123.444 110.109,123.444 ; 108.117,86.868 108.117,83.399 109.347,82.169 110.363,82.169 ; 108.585,165.862 110.617,167.894 110.617,176.149 109.474,177.292 ; 110.109,123.444 112.141,125.476 112.141,133.731 110.998,134.874 ; 110.363,82.169 112.395,84.201 112.395,92.456 111.252,93.599 ; 110.53,301.371 110.53,297.902 111.76,296.672 112.776,296.672 ; 110.911,259.08 110.911,255.611 112.141,254.381 113.157,254.381 ; 111.8,217.678 111.8,214.209 113.03,212.979 114.046,212.979 ; 112.776,296.672 114.808,298.704 114.808,306.959 113.665,308.102 ; 113.157,254.381 115.189,256.413 115.189,264.668 114.046,265.811 ; 114.046,212.979 116.078,215.011 116.078,223.266 114.935,224.409 ; 144.693,170.561 144.693,167.092 145.923,165.862 146.939,165.862 ; 145.074,128.27 145.074,124.801 146.304,123.571 147.32,123.571 ; 145.963,86.868 145.963,83.399 147.193,82.169 148.209,82.169 ; 146.939,165.862 148.971,167.894 148.971,176.149 147.828,177.292 ; 147.32,123.571 149.352,125.603 149.352,133.858 148.209,135.001 ; 148.209,82.169 150.241,84.201 150.241,92.456 149.098,93.599 ; 149.646,298.323 149.646,294.854 150.876,293.624 151.892,293.624 ; 151.17,255.905 151.17,252.436 152.4,251.206 153.416,251.206 ; 151.424,214.63 151.424,211.161 152.654,209.931 153.67,209.931 ; 151.892,293.624 153.924,295.656 153.924,303.911 152.781,305.054 ; 153.416,251.206 155.448,253.238 155.448,261.493 154.305,262.636 ; 153.67,209.931 155.702,211.963 155.702,220.218 154.559,221.361 ; 183.936,169.672 183.936,166.203 185.166,164.973 186.182,164.973 ; 184.698,127.762 184.698,124.293 185.928,123.063 186.944,123.063 ; 185.333,86.106 185.333,82.637 186.563,81.407 187.579,81.407 ; 186.182,164.973 188.214,167.005 188.214,175.26 187.071,176.403 ; 186.944,123.063 188.976,125.095 188.976,133.35 187.833,134.493 ; 187.579,81.407 189.611,83.439 189.611,91.694 188.468,92.837 ; 188,298.323 188,294.854 189.23,293.624 190.246,293.624 ; 188.381,256.032 188.381,252.563 189.611,251.333 190.627,251.333 ; 189.27,214.63 189.27,211.161 190.5,209.931 191.516,209.931 ; 190.246,293.624 192.278,295.656 192.278,303.911 191.135,305.054 ; 190.627,251.333 192.659,253.365 192.659,261.62 191.516,262.763 ; 191.516,209.931 193.548,211.963 193.548,220.218 192.405,221.361

## Polygon pours and split planes (outlines as drawn)
no net on Bottom Layer "Bottom Layer-No Net" (solid, pour order 32): 169.926,317.119 170.053,316.992 193.421,316.992 193.421,288.163 169.926,288.163 169.545,287.782
no net on Bottom Layer "Bottom Layer-No Net" (solid, pour order 32): 131.572,317.119 131.699,316.992 155.067,316.992 155.067,288.163 131.572,288.163 131.191,287.782
no net on Bottom Layer "Bottom Layer-No Net" (solid, pour order 32): 170.307,274.828 170.434,274.701 193.802,274.701 193.802,245.872 170.307,245.872 169.926,245.491
no net on Bottom Layer "Bottom Layer-No Net" (solid, pour order 32): 171.196,233.426 171.323,233.299 194.691,233.299 194.691,204.47 171.196,204.47 170.815,204.089
no net on Bottom Layer "Bottom Layer-No Net" (solid, pour order 32): 133.096,274.701 133.223,274.574 156.591,274.574 156.591,245.745 133.096,245.745 132.715,245.364
no net on Bottom Layer "Bottom Layer-No Net" (solid, pour order 32): 133.35,233.426 133.477,233.299 156.845,233.299 156.845,204.47 133.35,204.47 132.969,204.089
no net on Bottom Layer "Bottom Layer-No Net" (solid, pour order 32): 92.456,320.167 92.583,320.04 115.951,320.04 115.951,291.211 92.456,291.211 92.075,290.83
no net on Bottom Layer "Bottom Layer-No Net" (solid, pour order 32): 54.102,320.167 54.229,320.04 77.597,320.04 77.597,291.211 54.102,291.211 53.721,290.83
no net on Bottom Layer "Bottom Layer-No Net" (solid, pour order 32): 92.837,277.876 92.964,277.749 116.332,277.749 116.332,248.92 92.837,248.92 92.456,248.539
no net on Bottom Layer "Bottom Layer-No Net" (solid, pour order 32): 93.726,236.474 93.853,236.347 117.221,236.347 117.221,207.518 93.726,207.518 93.345,207.137
no net on Bottom Layer "Bottom Layer-No Net" (solid, pour order 32): 55.626,277.749 55.753,277.622 79.121,277.622 79.121,248.793 55.626,248.793 55.245,248.412
no net on Bottom Layer "Bottom Layer-No Net" (solid, pour order 32): 55.88,236.474 56.007,236.347 79.375,236.347 79.375,207.518 55.88,207.518 55.499,207.137
no net on Bottom Layer "Bottom Layer-No Net" (solid, pour order 32): 167.259,104.902 167.386,104.775 190.754,104.775 190.754,75.946 167.259,75.946 166.878,75.565
no net on Bottom Layer "Bottom Layer-No Net" (solid, pour order 32): 166.624,146.558 166.751,146.431 190.119,146.431 190.119,117.602 166.624,117.602 166.243,117.221
no net on Bottom Layer "Bottom Layer-No Net" (solid, pour order 32): 165.862,188.468 165.989,188.341 189.357,188.341 189.357,159.512 165.862,159.512 165.481,159.131
no net on Bottom Layer "Bottom Layer-No Net" (solid, pour order 32): 126.619,189.357 126.746,189.23 150.114,189.23 150.114,160.401 126.619,160.401 126.238,160.02
no net on Bottom Layer "Bottom Layer-No Net" (solid, pour order 32): 88.265,189.357 88.392,189.23 111.76,189.23 111.76,160.401 88.265,160.401 87.884,160.02
no net on Bottom Layer "Bottom Layer-No Net" (solid, pour order 32): 50.292,188.849 50.419,188.722 73.787,188.722 73.787,159.893 50.292,159.893 49.911,159.512
no net on Bottom Layer "Bottom Layer-No Net" (solid, pour order 32): 127,147.066 127.127,146.939 150.495,146.939 150.495,118.11 127,118.11 126.619,117.729
no net on Bottom Layer "Bottom Layer-No Net" (solid, pour order 32): 127.889,105.664 128.016,105.537 151.384,105.537 151.384,76.708 127.889,76.708 127.508,76.327
no net on Bottom Layer "Bottom Layer-No Net" (solid, pour order 32): 51.054,146.939 51.181,146.812 74.549,146.812 74.549,117.983 51.054,117.983 50.673,117.602
no net on Bottom Layer "Bottom Layer-No Net" (solid, pour order 32): 89.789,146.939 89.916,146.812 113.284,146.812 113.284,117.983 89.789,117.983 89.408,117.602
no net on Bottom Layer "Bottom Layer-No Net" (solid, pour order 32): 90.043,105.664 90.17,105.537 113.538,105.537 113.538,76.708 90.043,76.708 89.662,76.327
GND on Bottom Layer "Bottom Layer-No Net" (solid, pour order 32): 51.689,105.283 51.816,105.156 75.184,105.156 75.184,76.327 51.689,76.327 51.308,75.946

## Keep-outs
Keep-Out Layer:
  lines w0.3: 49.403,159.385 74.422,159.385 74.422,189.865 49.403,189.865 49.403,159.385 ; 50.165,117.475 75.184,117.475 75.184,147.955 50.165,147.955 50.165,117.475 ; 50.8,75.819 50.8,106.299 75.819,106.299 75.819,75.819 50.8,75.819 ; 53.213,290.703 78.232,290.703 78.232,321.183 53.213,321.183 53.213,290.703 ; 54.737,248.285 79.756,248.285 79.756,278.765 54.737,278.765 54.737,248.285 ; 54.991,207.01 80.01,207.01 80.01,237.49 54.991,237.49 54.991,207.01 ; 87.376,159.893 112.395,159.893 112.395,190.373 87.376,190.373 87.376,159.893 ; 88.9,117.475 113.919,117.475 113.919,147.955 88.9,147.955 88.9,117.475 ; 89.154,76.2 114.173,76.2 114.173,106.68 89.154,106.68 89.154,76.2 ; 91.567,290.703 116.586,290.703 116.586,321.183 91.567,321.183 91.567,290.703 ; 91.948,248.412 116.967,248.412 116.967,278.892 91.948,278.892 91.948,248.412 ; 92.837,207.01 117.856,207.01 117.856,237.49 92.837,237.49 92.837,207.01 ; 125.73,159.893 150.749,159.893 150.749,190.373 125.73,190.373 125.73,159.893 ; 126.111,117.602 151.13,117.602 151.13,148.082 126.111,148.082 126.111,117.602 ; 127,76.2 152.019,76.2 152.019,106.68 127,106.68 127,76.2 ; 130.683,287.655 155.702,287.655 155.702,318.135 130.683,318.135 130.683,287.655 ; 132.207,245.237 157.226,245.237 157.226,275.717 132.207,275.717 132.207,245.237 ; 132.461,203.962 157.48,203.962 157.48,234.442 132.461,234.442 132.461,203.962 ; 164.973,159.004 164.973,189.484 189.992,189.484 189.992,159.004 164.973,159.004 ; 165.735,117.094 165.735,147.574 190.754,147.574 190.754,117.094 165.735,117.094 ; 166.37,75.438 191.389,75.438 191.389,105.918 166.37,105.918 166.37,75.438 ; 169.037,287.655 194.056,287.655 194.056,318.135 169.037,318.135 169.037,287.655 ; 169.418,245.364 194.437,245.364 194.437,275.844 169.418,275.844 169.418,245.364 ; 170.307,203.962 195.326,203.962 195.326,234.442 170.307,234.442 170.307,203.962

## Dimensions
50.8,75.819 to 50.8,106.299 on Mechanical 1
51.435,76.581 to 75.819,75.819 on Mechanical 1